# Altium PCB Lichtschlag.PcbDoc
Units mil, origin at the board's own origin, x right, y up, seen from the top; angles counter-clockwise.
Board outline 3937.01 x 3937.01 mil, 4 copper layers (Top Layer, Internal Plane 1, Internal Plane 2, Bottom Layer), stack 18.2 mil thick; 93 components, 87 nets, 376 pads, 59 vias.
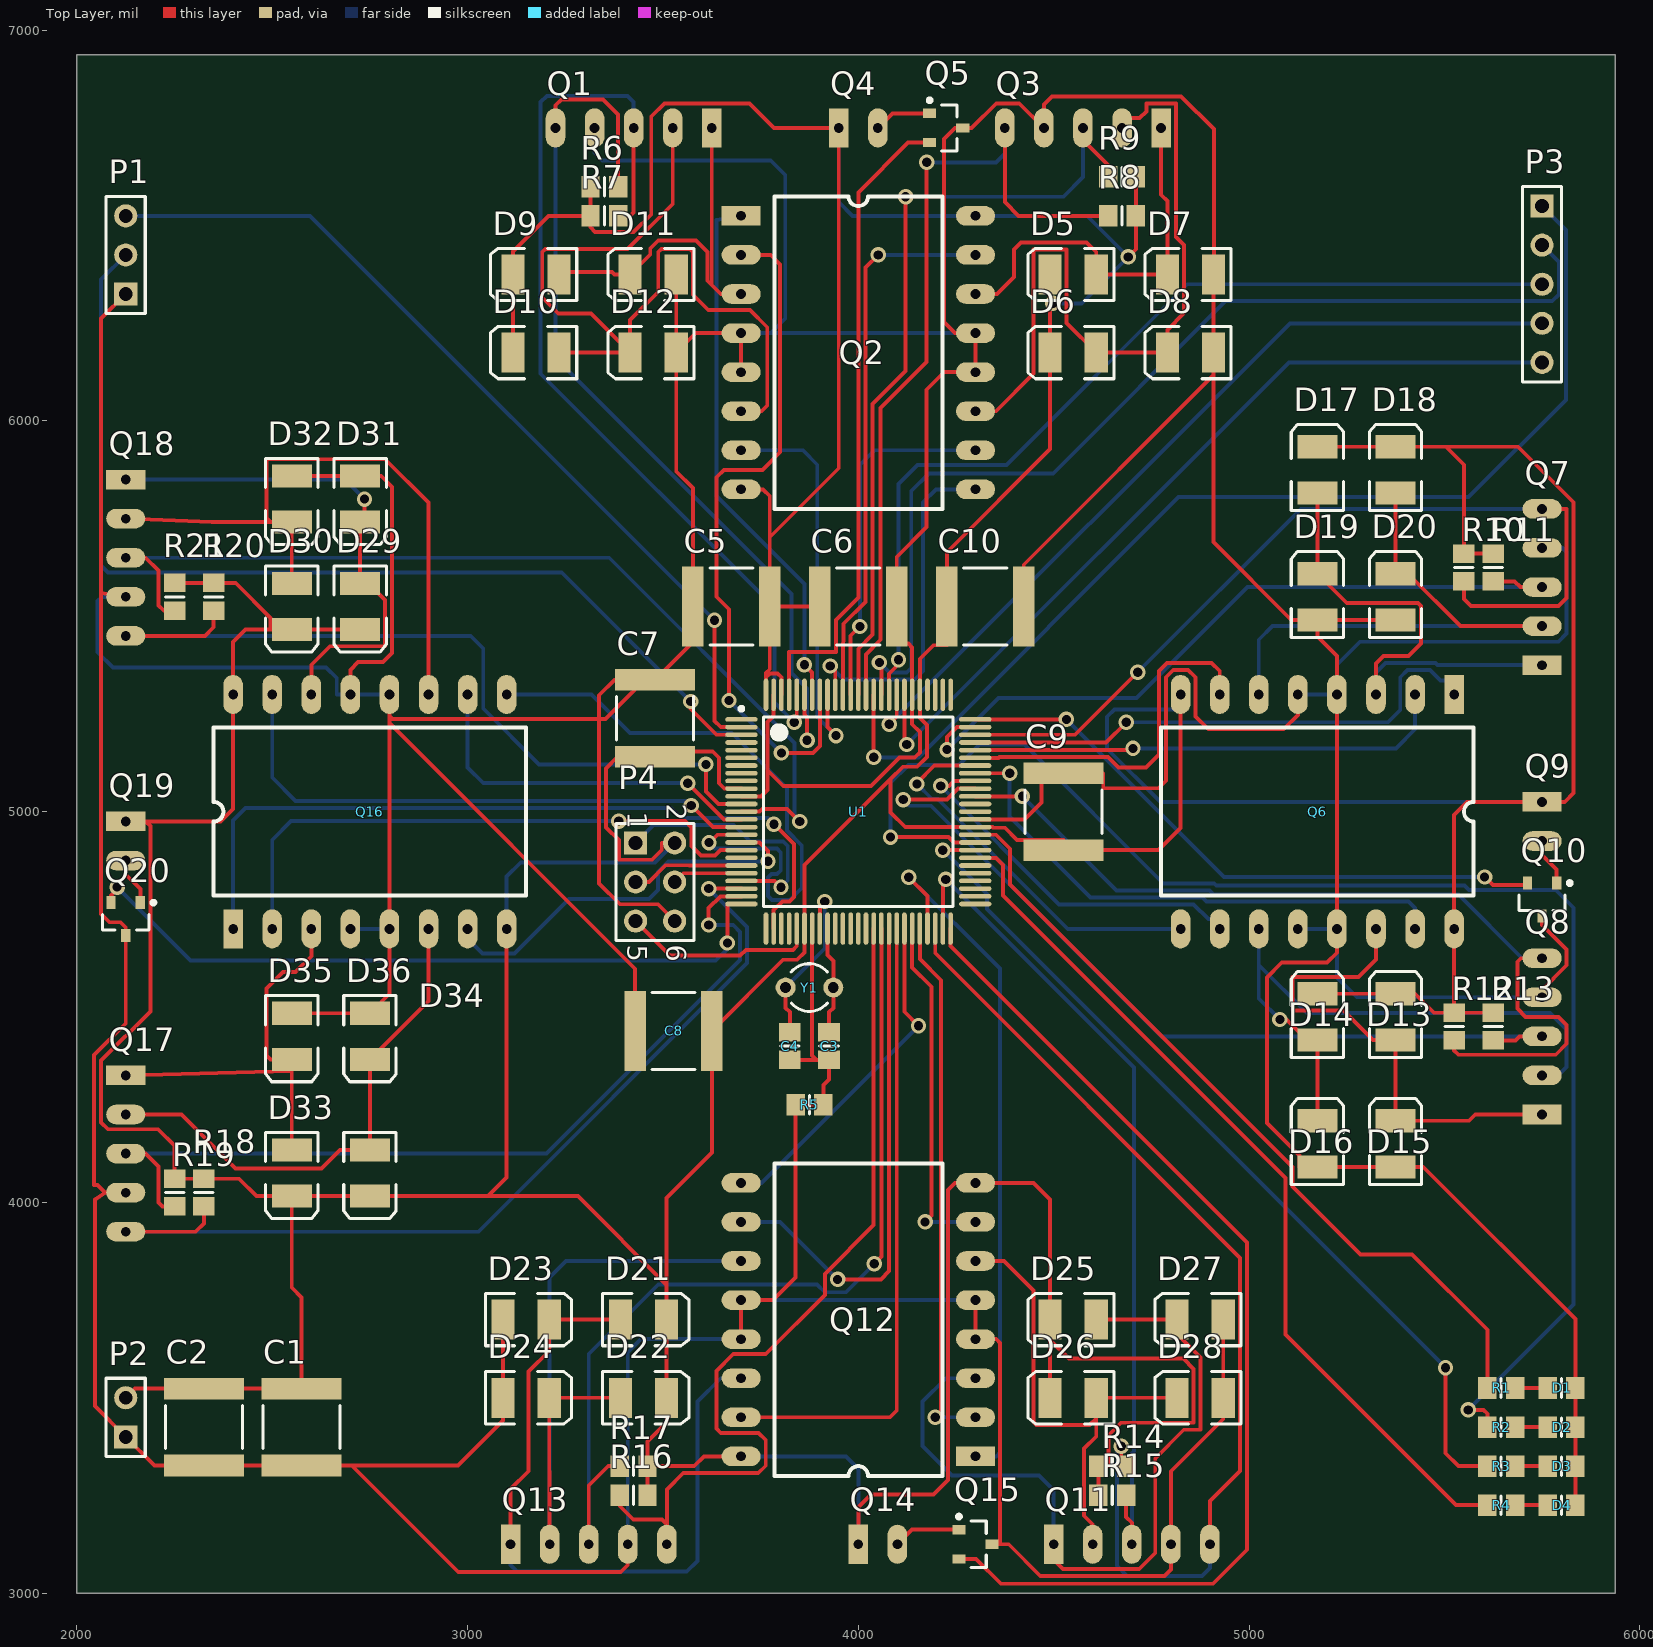
[diagram p0: Top Layer view]
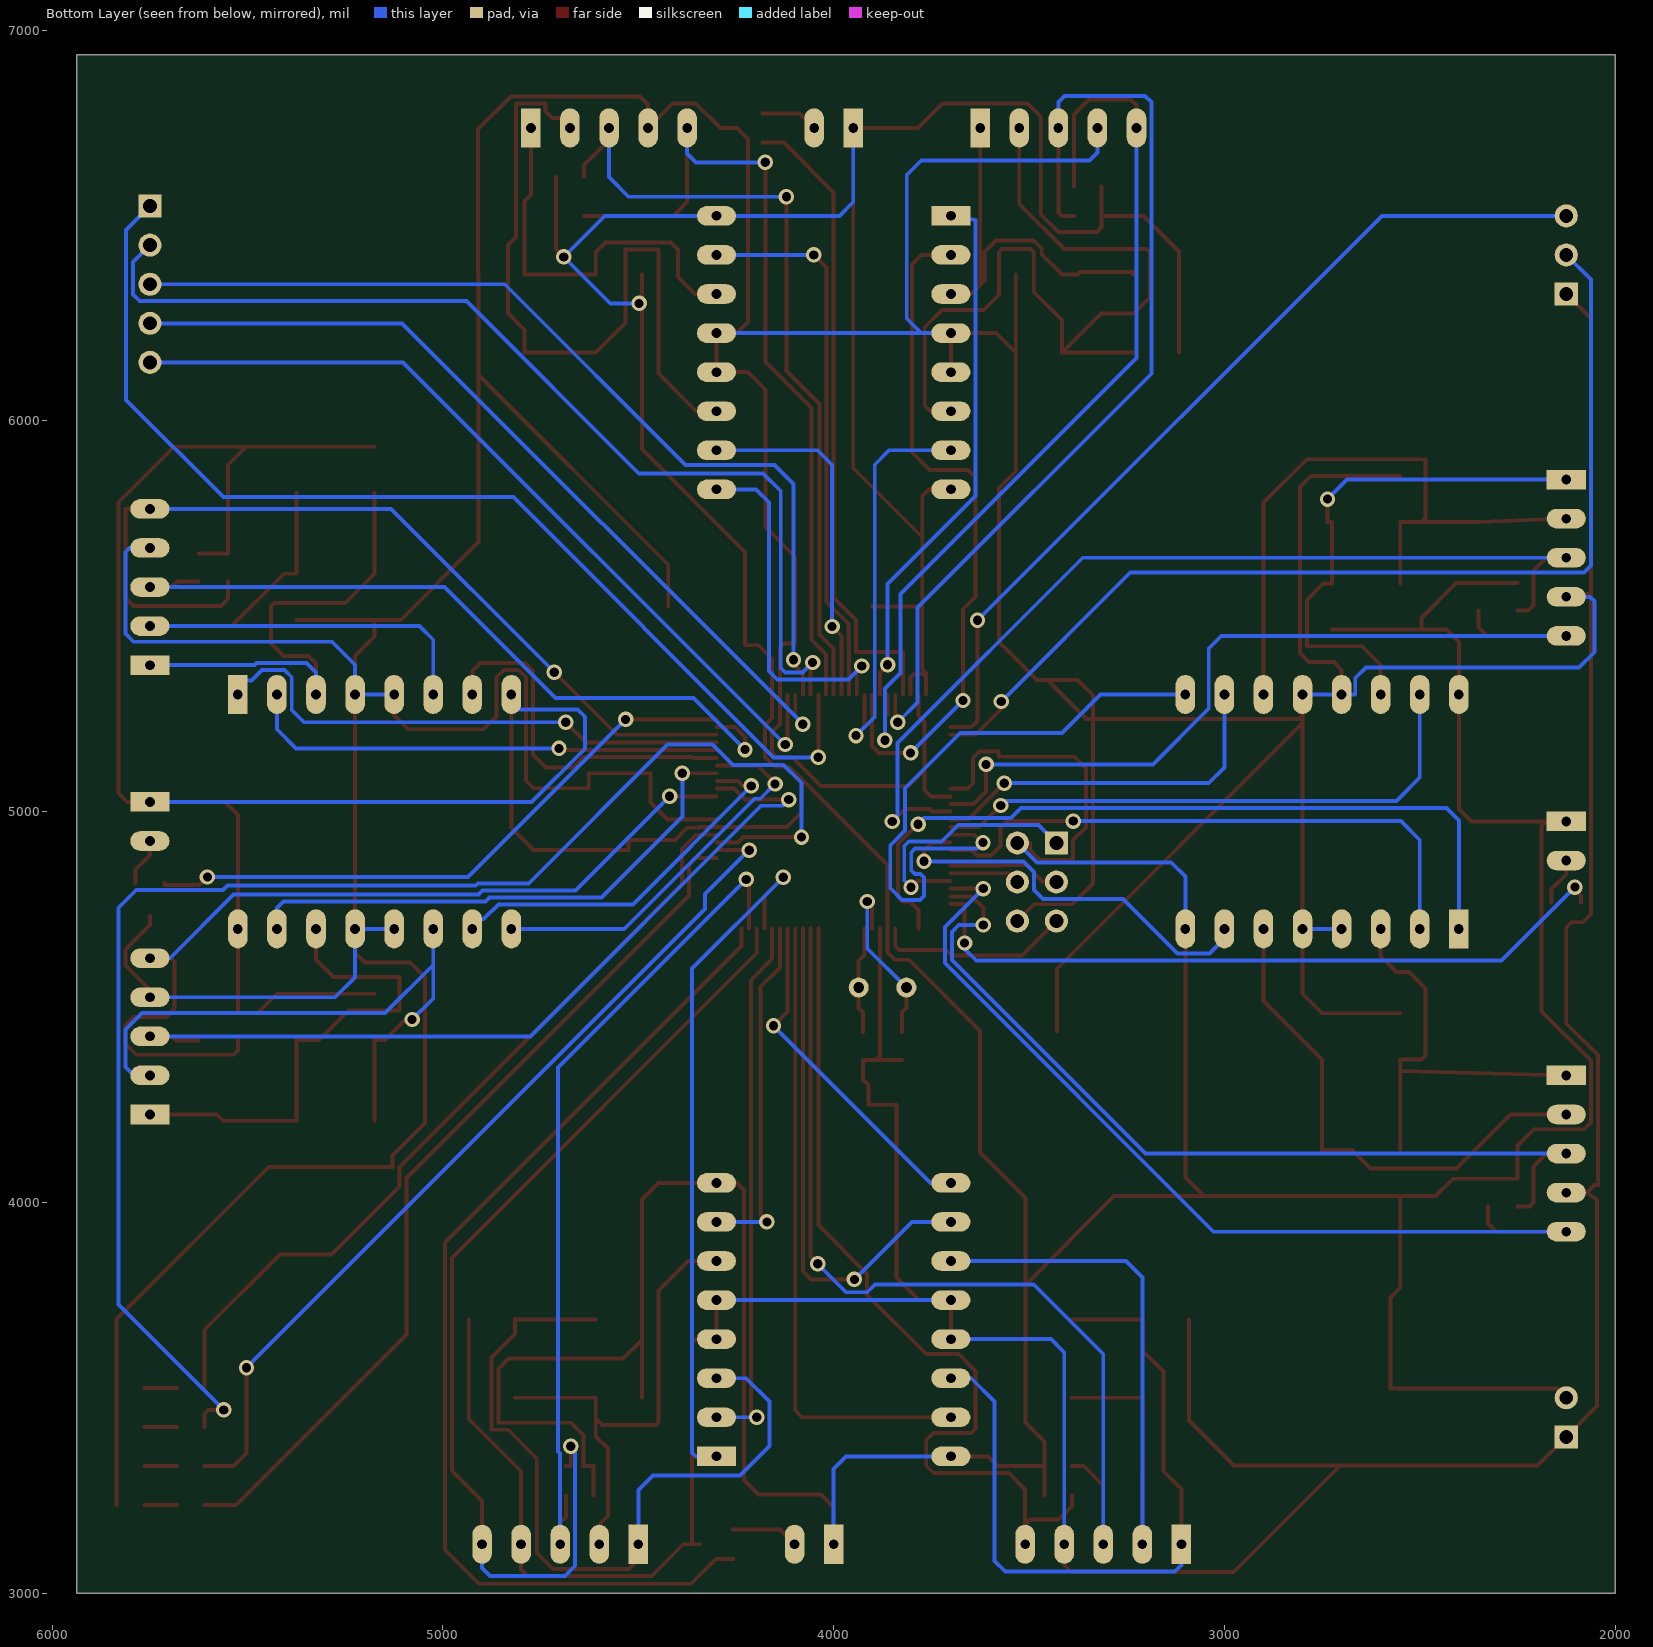
[diagram p1: Bottom Layer view, seen from below]
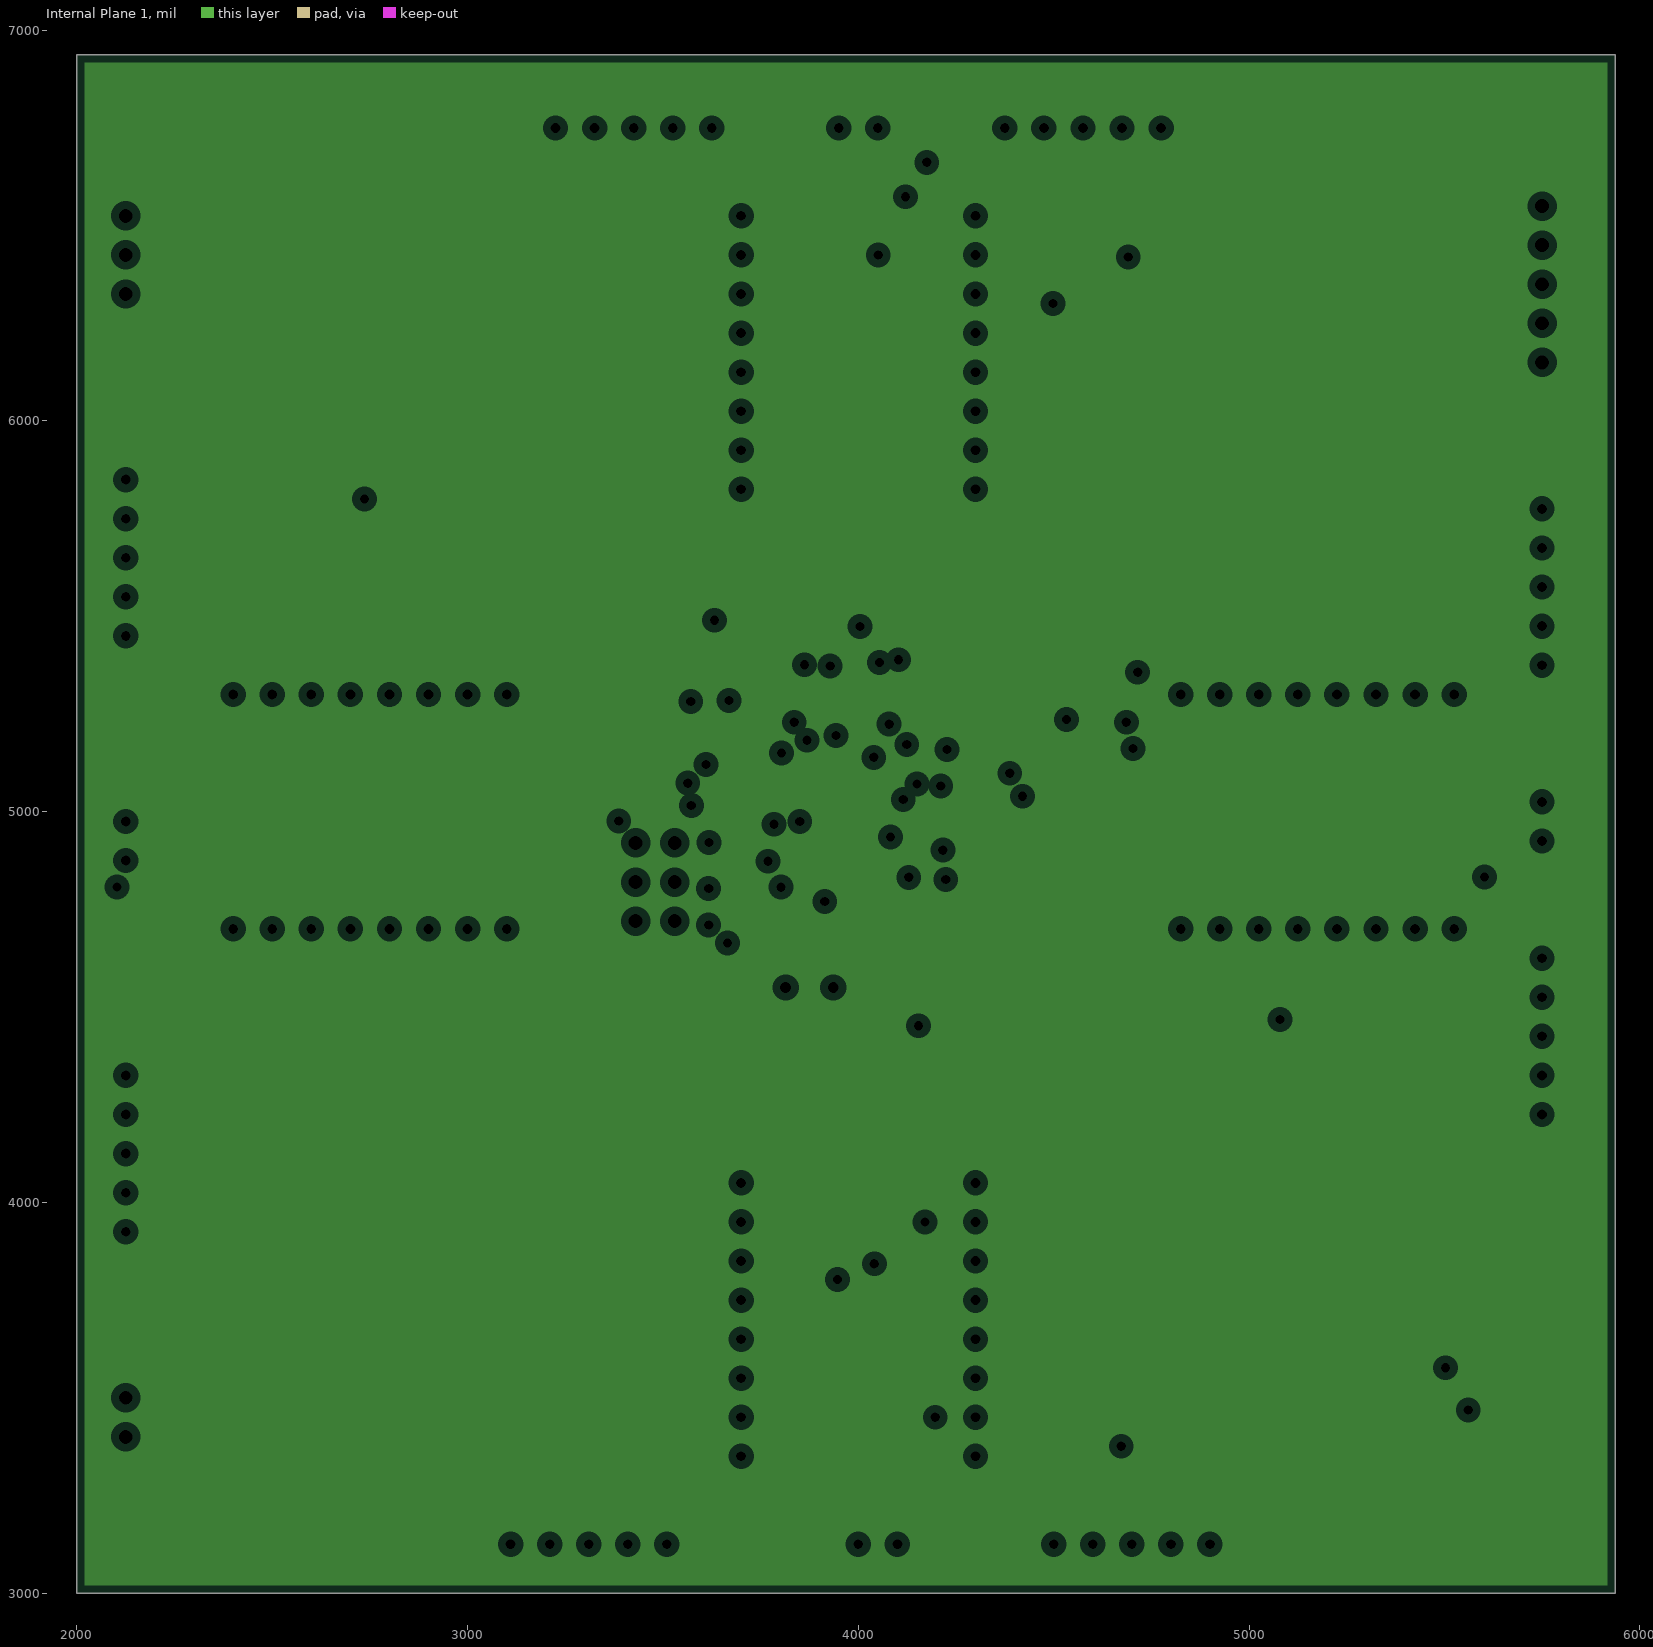
[diagram p2: Internal Plane 1, clearances drawn from the general rule]
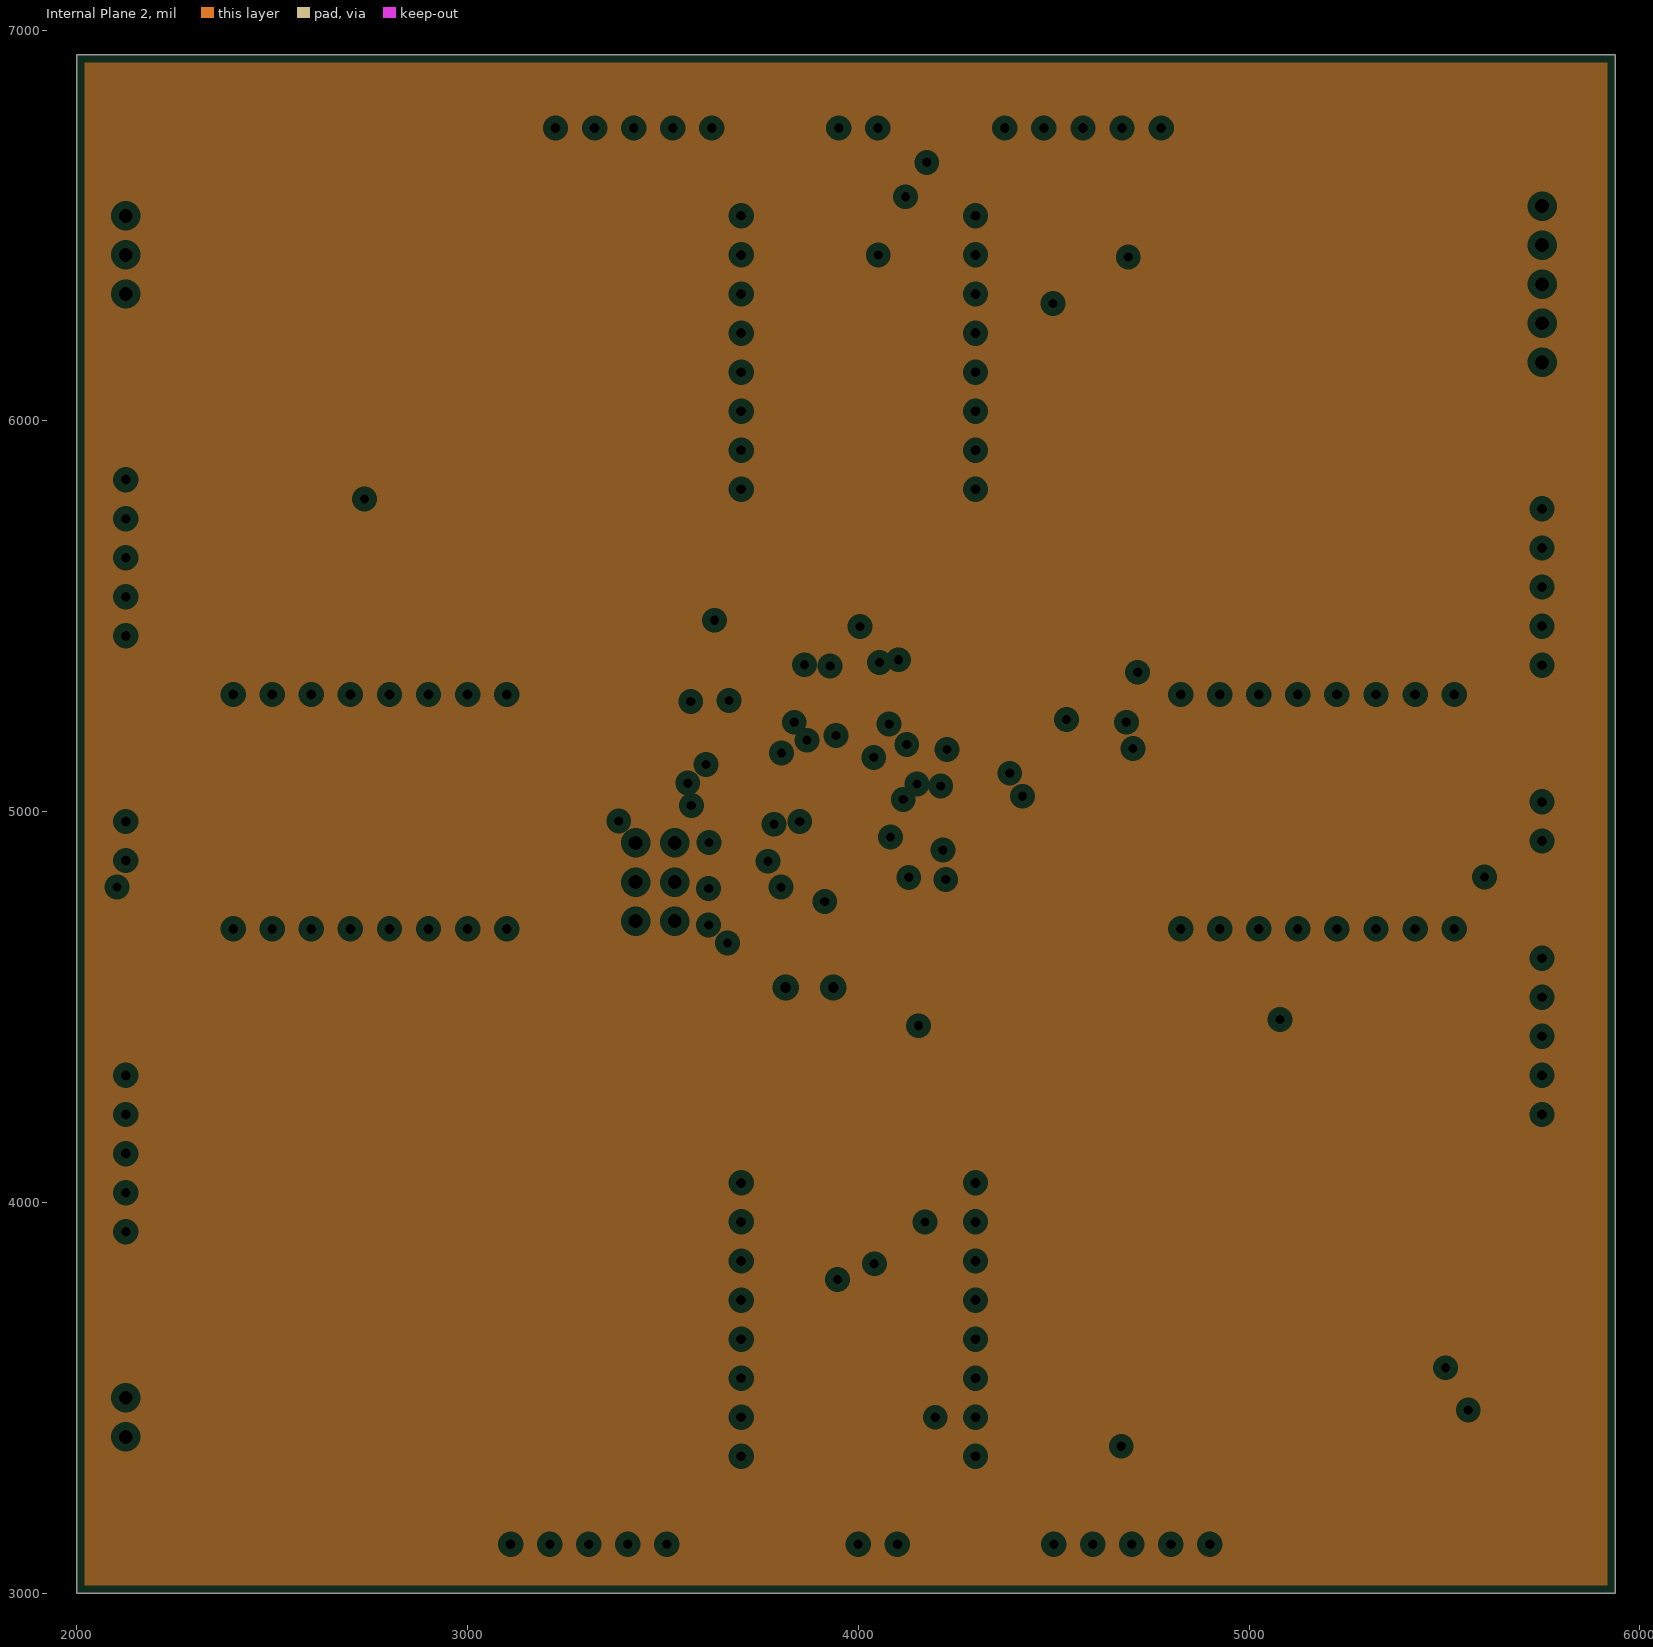
[diagram p3: Internal Plane 2, clearances drawn from the general rule]

## Layer stack, top to bottom
Top Solder: solder mask 0.4, Solder Resist, Dk 3.5
Top Layer: signal copper 1.4
Internal Plane 1: plane copper 1.4
Internal Plane 2: plane copper 1.4
Dielectric 1: dielectric 12.6, FR-4, Dk 4.8
Bottom Layer: signal copper 1.4
Bottom Solder: solder mask 0.4, Solder Resist, Dk 3.5

## Board outline
2000,3000 5937.01,3000 5937.01,6937.01 2000,6937.01

## Design rules (kind name [scope] priority, off if disabled: settings)
Clearance [All] p1: gap=7.87
PlaneClearance [All] p1: clearance=20
PlaneConnect [All] p1: planeconnectstyle=Relief reliefexpansion=20 reliefentries=4 reliefconductorwidth=10 reliefairgap=10
PolygonConnect [All] p1: connectstyle=Relief reliefconductorwidth=10 reliefentries=4 polygonreliefangle="90 Angle" airgapwidth=10
RoutingVias [All] p1: holewidth=23.62 width=39.37 viastyle="Through Hole" minholewidth=28 minwidth=50 maxholewidth=28 maxwidth=50
SolderMaskExpansion [All] p1: expansion=4
UnpouredPolygon [All] p1: allowunpoured=FALSE
Width [All] p1: maxlimit=50 minlimit=8 preferedwidth=10
27 further rules are at their usual default settings.

## Classes and differential pairs
component class CPU: C1 C2 C3 C4 C5 C6 C7 C8 C9 C10 D1 D2 D3 D4 P1 P2 P3 P4 R1 R2 R3 R4 R5 U1 Y1
component class Motor1: D5 D6 D7 D8 D9 D10 D11 D12 D13 D14 D15 D16 D17 D18 D19 D20 Q1 Q2 Q3 Q4 Q5 Q6 Q7 Q8 Q9 Q10 R6 R7 R8 R9 R10 R11 R12 R13
component class Motor2: D21 D22 D23 D24 D25 D26 D27 D28 D29 D30 D31 D32 D33 D34 D35 D36 Q11 Q12 Q13 Q14 Q15 Q16 Q17 Q18 Q19 Q20 R14 R15 R16 R17 R18 R19 R20 R21

## Components (designator, comment, footprint, x,y, rotation, side; value= is the part's Value field where it differs from the comment)
C1 "47uF" 2220 2575,3425 r270 top
C2 "100nF" 2220 2325,3425 r90 top
C3 "22pF" 6-0805_N 3925,4400 r90 top
C4 "22pF" 6-0805_N 3825,4400 r90 top
C5 "100nF" 2220 3675,5525 r0 top
C6 "100nF" 2220 4000,5525 r180 top
C7 "100nF" 2220 3480,5239 r270 top
C8 "100nF" 2220 3527,4439 r0 top
C9 "100nF" 2220 4525,5000 r270 top
C10 "100nF" 2220 4325,5525 r180 top
D1 "LED3-BL" 6-0805_N 5800,3525 r0 top
D2 "LED3-GN" 6-0805_N 5800,3425 r0 top
D3 "LED3-RT" 6-0805_N 5800,3325 r0 top
D4 "LED3-YE" 6-0805_N 5800,3225 r0 top
D5 "Diode" 3.5X2.8X1.9 4550,6375 r180 top
D6 "Diode" 3.5X2.8X1.9 4550,6175 r180 top
D7 "Diode" 3.5X2.8X1.9 4850,6375 r180 top
D8 "Diode" 3.5X2.8X1.9 4850,6175 r180 top
D9 "Diode" 3.5X2.8X1.9 3175,6375 r180 top
D10 "Diode" 3.5X2.8X1.9 3175,6175 r180 top
D11 "Diode" 3.5X2.8X1.9 3475,6375 r180 top
D12 "Diode" 3.5X2.8X1.9 3475,6175 r180 top
D13 "Diode" 3.5X2.8X1.9 5375,4475 r90 top
D14 "Diode" 3.5X2.8X1.9 5175,4475 r90 top
D15 "Diode" 3.5X2.8X1.9 5375,4150 r90 top
D16 "Diode" 3.5X2.8X1.9 5175,4150 r90 top
D17 "Diode" 3.5X2.8X1.9 5175,5875 r90 top
D18 "Diode" 3.5X2.8X1.9 5375,5875 r90 top
D19 "Diode" 3.5X2.8X1.9 5175,5550 r90 top
D20 "Diode" 3.5X2.8X1.9 5375,5550 r90 top
D21 "Diode" 3.5X2.8X1.9 3450,3700 r0 top
D22 "Diode" 3.5X2.8X1.9 3450,3500 r0 top
D23 "Diode" 3.5X2.8X1.9 3150,3700 r0 top
D24 "Diode" 3.5X2.8X1.9 3150,3500 r0 top
D25 "Diode" 3.5X2.8X1.9 4550,3700 r180 top
D26 "Diode" 3.5X2.8X1.9 4550,3500 r180 top
D27 "Diode" 3.5X2.8X1.9 4875,3700 r180 top
D28 "Diode" 3.5X2.8X1.9 4875,3500 r180 top
D29 "Diode" 3.5X2.8X1.9 2725,5525 r270 top
D30 "Diode" 3.5X2.8X1.9 2550,5525 r270 top
D31 "Diode" 3.5X2.8X1.9 2725,5800 r270 top
D32 "Diode" 3.5X2.8X1.9 2550,5800 r270 top
D33 "Diode" 3.5X2.8X1.9 2550,4075 r270 top
D34 "Diode" 3.5X2.8X1.9 2750,4075 r270 top
D35 "Diode" 3.5X2.8X1.9 2550,4425 r270 top
D36 "Diode" 3.5X2.8X1.9 2750,4425 r270 top
P1 "COM" HDR1X3 2125,6325 r90 top
P2 "Power" HDR1X2 2125,3400 r90 top
P3 "ADC" HDR1X5 5750,6550 r270 top
P4 "Header 3X2" HDR2X3 3430,4920 r270 top
Q1 "L_CON" "Lichschlag Connector" 3625,6750 r270 top
Q2 "L293D" L293D 3700,6525 r0 top
Q3 "L_CON" "Lichschlag Connector" 4775,6750 r270 top
Q4 "Lichtschlag LED" "Lichtschlag LED" 3950,6750 r90 top
Q5 "QNPN" SOT-23B_L 4225,6750 r0 top
Q6 "L293D" L293D 5525,5300 r270 top
Q7 "L_CON" "Lichschlag Connector" 5750,5375 r180 top
Q8 "L_CON" "Lichschlag Connector" 5750,4225 r180 top
Q9 "Lichtschlag LED" "Lichtschlag LED" 5750,5025 r0 top
Q10 "QNPN" SOT-23B_L 5750,4775 r270 top
Q11 "L_CON" "Lichschlag Connector" 4500,3125 r90 top
Q12 "L293D" L293D 4300,3350 r180 top
Q13 "L_CON" "Lichschlag Connector" 3110,3125 r90 top
Q14 "Lichtschlag LED" "Lichtschlag LED" 4000,3125 r90 top
Q15 "QNPN" SOT-23B_L 4300,3125 r0 top
Q16 "L293D" L293D 2400,4700 r90 top
Q17 "L_CON" "Lichschlag Connector" 2125,4325 r0 top
Q18 "L_CON" "Lichschlag Connector" 2125,5850 r0 top
Q19 "Lichtschlag LED" "Lichtschlag LED" 2125,4975 r0 top
Q20 "QNPN" SOT-23B_L 2125,4725 r270 top
R1 "1k" 6-0805_N 5645.47,3525 r0 top
R2 "1k" 6-0805_N 5645.47,3425 r0 top
R3 "1k" 6-0805_N 5645.47,3325 r0 top
R4 "1k" 6-0805_N 5645.47,3225 r0 top
R5 "1.1M" 6-0805_N 3875,4250 r0 top
R6 "100K" 6-0805_N 3350,6600 r180 top
R7 "100K" 6-0805_N 3350,6525 r180 top
R8 "100K" 6-0805_N 4675,6525 r0 top
R9 "100K" 6-0805_N 4675,6625 r0 top
R10 "100K" 6-0805_N 5550,5625 r90 top
R11 "100K" 6-0805_N 5625,5625 r90 top
R12 "100K" 6-0805_N 5525,4450 r90 top
R13 "100K" 6-0805_N 5625,4450 r90 top
R14 "100K" 6-0805_N 4650,3325 r180 top
R15 "100K" 6-0805_N 4650,3250 r180 top
R16 "100K" 6-0805_N 3425,3250 r0 top
R17 "100K" 6-0805_N 3425,3325 r0 top
R18 "100K" 6-0805_N 2325,4025 r90 top
R19 "100K" 6-0805_N 2250,4025 r90 top
R20 "100K" 6-0805_N 2350,5550 r90 top
R21 "100K" 6-0805_N 2250,5550 r90 top
U1 "ATmega2560-16AU" 100A_M 4000,5000 r0 top
Y1 "16Mhz" R38 3875,4550 r270 top

## Footprints (in the part's own frame and the unit in brackets; to place one, negate y for a bottom-side part, rotate by r counter-clockwise, add the part's x,y. Pads: shape width x height; smd on the part's side, far side on the other; paste and mask are expansions set on the pad)
3.5X2.8X1.9 [mm] "SM LED; 2 C-Bend Leads; Body 3.5 x 2.8 x 1.9 mm, inc leads (LxWxH typ)"
  rect 1.5x2.6 smd: 1(-1.5,0) 2(1.5,0)
  silkscreen extent -2.65,-1.7 2.95,1.7
6-0805_N [mm] "Chip Resistor, Body 2.0x1.2mm, IPC Medium Density"
  rect 1.2x1.4 smd: 1(-0.9,0) 2(0.9,0)
  silkscreen extent 0,-0.6 0,0.6, body extent -1.07,-0.7 1.07,0.7, height 0.7
100A_M [mm] "Thin QFP, 100-Leads, Body 14x14mm, Pitch 0.5mm, IPC Low Density"
  oval 2.1x0.3 smd: 1(-7.6,6) 2(-7.6,5.5) 3(-7.6,5) 4(-7.6,4.5) 5(-7.6,4) 6(-7.6,3.5) 7(-7.6,3) 8(-7.6,2.5) 9(-7.6,2) 10(-7.6,1.5) 11(-7.6,1) 12(-7.6,0.5) 13(-7.6,0) 14(-7.6,-0.5) 15(-7.6,-1) 16(-7.6,-1.5) 17(-7.6,-2) 18(-7.6,-2.5) 19(-7.6,-3) 20(-7.6,-3.5) 21(-7.6,-4) 22(-7.6,-4.5) 23(-7.6,-5) 24(-7.6,-5.5) 25(-7.6,-6) 51(7.6,-6) 52(7.6,-5.5) 53(7.6,-5) 54(7.6,-4.5) 55(7.6,-4) 56(7.6,-3.5) 57(7.6,-3) 58(7.6,-2.5) 59(7.6,-2) 60(7.6,-1.5) 61(7.6,-1) 62(7.6,-0.5) 63(7.6,0) 64(7.6,0.5) 65(7.6,1) 66(7.6,1.5) 67(7.6,2) 68(7.6,2.5) 69(7.6,3) 70(7.6,3.5) 71(7.6,4) 72(7.6,4.5) 73(7.6,5) 74(7.6,5.5) 75(7.6,6)
  oval 0.3x2.1 smd: 26(-6,-7.6) 27(-5.5,-7.6) 28(-5,-7.6) 29(-4.5,-7.6) 30(-4,-7.6) 31(-3.5,-7.6) 32(-3,-7.6) 33(-2.5,-7.6) 34(-2,-7.6) 35(-1.5,-7.6) 36(-1,-7.6) 37(-0.5,-7.6) 38(0,-7.6) 39(0.5,-7.6) 40(1,-7.6) 41(1.5,-7.6) 42(2,-7.6) 43(2.5,-7.6) 44(3,-7.6) 45(3.5,-7.6) 46(4,-7.6) 47(4.5,-7.6) 48(5,-7.6) 49(5.5,-7.6) 50(6,-7.6) 76(6,7.6) 77(5.5,7.6) 78(5,7.6) 79(4.5,7.6) 80(4,7.6) 81(3.5,7.6) 82(3,7.6) 83(2.5,7.6) 84(2,7.6) 85(1.5,7.6) 86(1,7.6) 87(0.5,7.6) 88(0,7.6) 89(-0.5,7.6) 90(-1,7.6) 91(-1.5,7.6) 92(-2,7.6) 93(-2.5,7.6) 94(-3,7.6) 95(-3.5,7.6) 96(-4,7.6) 97(-4.5,7.6) 98(-5,7.6) 99(-5.5,7.6) 100(-6,7.6)
  silkscreen extent -7.72,-6.15 6.15,6.82, body extent -7,-7 7,7, height 1.6
2220 [mm] "Chip Capacitor, Body 5.7x5.0mm, IPC High Density"
  rect 1.4x5.2 smd: 1(-2.5,0) 2(2.5,0)
  silkscreen extent -1.4,-2.5 1.4,2.5, body extent -2.95,-2.63 2.95,2.63, height 1.4
HDR1X2 [mm] "Connector; Header; 2 Position"
  rect 1.5x1.5 hole 0.9: 1(0,0)
  round 1.5 hole 0.9: 2(2.54,0)
  silkscreen extent -1.27,-1.27 3.81,1.27
HDR1X3 [mm] "Connector; Header; 3 Position"
  rect 1.5x1.5 hole 0.9: 1(0,0)
  round 1.5 hole 0.9: 2(2.54,0) 3(5.08,0)
  silkscreen extent -1.27,-1.27 6.35,1.27
HDR1X5 [mm] "Connector; Header; 5 Position"
  rect 1.5x1.5 hole 0.9: 1(0,0)
  round 1.5 hole 0.9: 2(2.54,0) 3(5.08,0) 4(7.62,0) 5(10.16,0)
  silkscreen extent -1.27,-1.27 11.43,1.27
HDR2X3 [mm] "Connector; Header; 3x2 Position"
  rect 1.5x1.5 hole 0.9: 1(0,0)
  round 1.5 hole 0.9: 2(0,2.54) 3(2.54,0) 4(2.54,2.54) 5(5.08,0) 6(5.08,2.54)
  silkscreen extent -1.27,-1.27 6.35,3.81
L293D [mil]
  rect 100x50 hole 25: 1(0,0)
  oval 100x50 hole 25: 2(0,-100) 3(0,-200) 4(0,-300) 5(0,-400) 6(0,-500) 7(0,-600) 8(0,-700) 9(600,-700) 10(600,-600) 11(600,-500) 12(600,-400) 13(600,-300) 14(600,-200) 15(600,-100) 16(600,0)
  silkscreen extent 85,-750 515,50
"Lichschlag Connector" [mil]
  rect 100x50 hole 25: 1(0,0)
  oval 100x50 hole 25: 2(0,-100) 3(0,-200) 4(0,-300) 5(0,-400)
"Lichtschlag LED" [mil]
  rect 100x50 hole 25: 1(0,0)
  oval 100x50 hole 25: 2(0,-100)
R38 [mm] "Crystal, Thru-Hole; 2 Leads; Body 3.1 x 8.2 mm (Dia.xH)"
  round 1.3 hole 0.7: 1(0,1.55) 2(0,-1.55)
  silkscreen extent -1.55,-1.19 1.55,1.17
SOT-23B_L [mm] "SOT23, 3-Leads, Body 2.9x1.3mm, Pitch 0.95mm, Lead Span 2.4mm, IPC High Density"
  rect 0.85x0.6 smd: 1(-1.075,0.95) 2(-1.075,-0.95) 3(1.075,0)
  silkscreen extent -1.2,-1.5 0.7,1.92, body extent -0.7,-1.5 0.7,1.5, height 1.14

## Part data
C1: library part "Cap Pol3", "Polarized Capacitor (Surface Mount)"
C2 C3 C4 C5 C6 C7 C8 C9 C10: library part "Cap Semi", "Capacitor (Semiconductor SIM Model)"
D1 D2 D3 D4: library part LED3, "Typical BLUE SiC LED"
D5 D6 D7 D8 D9 D10 D11 D12 D13 D14 D15 D16 D17 D18 D19 D20 D21 D22 D23 D24 D25 D26 D27 D28 D29 D30 D31 D32 D33 D34 D35 D36: "Default Diode"
P1: library part "Header 3", "Header, 3-Pin"
P2: library part "Header 2", "Header, 2-Pin"
P3: library part "Header 5", "Header, 5-Pin"
P4: "Header, 3-Pin, Dual row"
Q1 Q3 Q7 Q8 Q11 Q13 Q17 Q18: library part "Lichtschlag Connector", "Lichtschlag Connector"
Q2 Q6 Q12 Q16: "H-Bridge"
Q4 Q9 Q14 Q19: "NPN General Purpose Amplifier"
Q5 Q10 Q15 Q20: "NPN Bipolar Transistor"
R1 R2 R3 R4 R5 R6 R7 R8 R9 R10 R11 R12 R13 R14 R15 R16 R17 R18 R19 R20 R21: library part Res3, "Resistor"
U1: library part CMP-0095-00210-2, "8-bit AVR Microcontroller, 4.5-5.5V, 16MHz, 256KB Flash, 4KB EEPROM, 8KB SRAM, 86 GPIO pins, 100-pin TQFP, Industrial Grade (-40°C to 85°C), Pb-Free"
Y1: library part XTAL, "Crystal Oscillator"

## Via types
v1: diameter 39.37, hole 23.62, Top Layer to Bottom Layer, 59 vias

## Nets (pads, with @x,y where several pads share a name; then routed paths per layer and width w, separated by ;. In a path a pad name is that pad's centre, name@x,y a point inside that pad or via, vN(x,y) a via of type N, cw(c..) or ccw(c..) an arc to the next point about the centre after c; other vN are vias at no path point)
5V: C1.1 C2.2 C5.2 C6.2 C7.2 C8.2 C9.2 C10.2 D5.2 D6.2 D9.2 D10.2 D13.2 D14.2 D17.2 D18.2 D21.2 D22.2 D25.2 D26.2 D29.2 D30.2 D33.2 D34.2 P2.2 P4.2 Q2.8 Q2.16 Q4.1 Q6.8 Q6.16 Q9.1 Q12.8 Q12.16 Q14.1 Q16.8 Q16.16 Q19.1 R6.2 R7.2 R8.2 R9.2 R10.2 R11.2 R12.2 R13.2 R14.2 R15.2 R16.2 R17.2 R18.2 R19.2 R20.2 R21.2 U1.10 U1.31 U1.61 U1.80 U1.98 U1.100 | length 25021.1
  Top Layer w10: P2.2 2148.43,3523.43 C2.2 C1.1 2575,3757 2550,3782 D33.2 ; Q19.1 2176,4975 ; R21.2 R20.2 2406.57,5585.43 2496,5496 2496,5465.94 ; D29.2 D30.2 2496,5465.94 ; Q16.8 3100,4064 3051.94,4015.94 ; D10.2 D9.2 3115.94,6433.94 3207,6525 R7.2 ; R6.2 R7.2 ; R16.2 R17.2 ; P4.2 3497,4920 3497,4902 3472,4877 3387,4877 3387,4927.44 3354.44,4960 3354.44,5111.01 3384,5140.57 C7.2 3577.44,5140.57 3577.44,5153.56 3627.41,5153.56 3642.95,5138.02 3642.95,5072.92 3656.81,5059.06 U1.10 ; Q12.16 3605,3350 3580,3325 R17.2 ; Q2.8 3756.43,5825 3773.43,5808 3773.43,5702.43 ; U1.100 3763.78,5344 ; U1.98 3803.15,5344 3793.15,5354 3773.78,5354 3763.78,5344 ; C6.2 C5.2 ; Q14.1 4000,3220 4032,3252 4192,3252 4230,3290 4230,4032 4248,4050 Q12.8 4448,4050 4490.94,4007.06 D25.2 4490.94,3648 ; D26.2 4490.94,3648 ; D5.2 v1@4490.94,6308.06 ; v1(4498,6301) v1@4490.94,6308.06 ; R15.2 R14.2 4640,3325 4640,3403.94 4672,3435.94 4858.35,3435.94 4858.35,3573.65 4832,3600 4538.94,3600 4490.94,3648 ; v1(4691,6420) 4710.43,6439.43 R8.2 R9.2 ; Q6.8 4825,4958.57 4768,4901.57 C9.2 4525,4928 4406,4928 4375.18,4958.82 4344.81,4958.82 4343,4960.63 U1.61 4120.25,4960.63 4082.44,4998.44 4082.44,5083.44 ; D14.2 D13.2 5425,4534.06 5473.62,4485.43 R12.2 ; D17.2 D18.2 5504,5934.06 ; R13.2 R12.2 ; R11.2 R10.2 5550,5888.06 5504,5934.06 ; 2176,4975 2368,4975 2400,5007 Q16.16 2400,5433.94 2432,5465.94 2496,5465.94 ; 2176,4975 2188,4963 2188,4488.75 2062.13,4362.87 2062.13,4205 2080,4187.13 2208,4187.13 2250,4145.13 R19.2 R18.2 2415,4060.43 2459.49,4015.94 D33.2 ; D33.2 D34.2 3051.94,4015.94 ; 3051.94,4015.94 3282.06,4015.94 3509.06,3788.94 ; R7.2 3314.57,6496 3326.57,6484 3425,6484 3470,6529 3470,6779 3504,6813 3721,6813 3784,6750 Q4.1 3950,5879 3773.43,5702.43 ; R17.2 3460.43,3388 3509.06,3436.62 D22.2 D21.2 3509.06,3788.94 ; 3509.06,3788.94 3509.06,4011 3625.43,4127.37 C8.2 3807.43,4621 3843.2,4621 3862.2,4640 U1.31 3862.2,4863.2 4082.44,5083.44 ; 3763.78,5344 3763.78,5355 3773.43,5364.65 C5.2 ; C5.2 3773.43,5702.43 ; 4082.44,5083.44 4114.1,5115.1 4150.58,5115.1 4175.35,5139.88 4175.35,5222.06 4157.48,5239.94 U1.80 4157.48,5391.48 4192,5426 4226.57,5426 C10.2 4226.57,5664 4490.94,5928.37 D6.2 v1@4490.94,6308.06 ; 5504,5934.06 5688.94,5934.06 5831,5792 5831,5048 5808,5025 Q9.1 5558,5025 5525,4992 Q6.16 R12.2
  Bottom Layer w10: Q16.8 3100,4834 3136,4870 3480,4870 P4.2 ; Q12.16 3968,3350 4000,3318 Q14.1 ; Q4.1 3950,6560 3985,6525 Q2.16 4586,6525 v1(4691,6420) 4572,6301 v1(4498,6301) ; Q6.8 4825,5262 4656,5262 4637,5243 4637,5161 4773,5025 Q9.1
GND: C1.2 C2.1 C3.1 C4.1 C5.1 C6.1 C7.1 C8.1 C9.1 C10.1 D1.2 D2.2 D3.2 D4.2 D7.1 D8.1 D11.1 D12.1 D15.1 D16.1 D19.1 D20.1 D23.1 D24.1 D27.1 D28.1 D31.1 D32.1 D35.1 D36.1 P1.1 P2.1 P4.6 Q1.4 Q2.4 Q2.5 Q2.12 Q2.13 Q3.4 Q5.3 Q6.4 Q6.5 Q6.12 Q6.13 Q7.4 Q8.4 Q10.3 Q11.4 Q12.4 Q12.5 Q12.12 Q12.13 Q13.4 Q15.3 Q16.4 Q16.5 Q16.12 Q16.13 Q17.4 Q18.4 Q20.3 R5.1 R5.2 U1.11 U1.32 U1.62 U1.81 U1.99 | length 30936.1
  Top Layer w10: Q17.4 2072,4025 ; Q18.4 2062,5560 ; P1.1 2062,6262 2062,5560 ; D35.1 D36.1 2800,4534.06 Q16.5 2800,5226.57 ; D32.1 D31.1 2778.94,5859.06 2806.93,5831.07 2806.93,5405.93 2784,5383 2720,5383 2700,5363 Q16.13 ; Q16.12 2800,5245 ; D23.1 D24.1 3090.94,3442 2975.52,3326.57 2703.43,3326.57 ; Q13.4 3410,3072 3392,3054 2976,3054 2703.43,3326.57 ; C8.1 3428.57,4598 2800,5226.57 ; P4.6 3487,4763 3390,4763 3336.57,4816.43 3336.57,5237 ; D11.1 D12.1 ; Q12.13 Q12.12 3781.57,3750 3839.57,3808 R5.1 R5.2 3910.43,4300 3925,4314.57 C3.1 3893.32,4364.57 ; Q2.5 Q2.4 3584.06,6225 D12.1 ; U1.11 3751.37,5039.37 3768,5056 3768,5106 ; U1.99 3783.46,5245 3768,5229.54 3768,5106 ; C4.1 3893.32,4364.57 ; U1.32 3881.89,4376 3893.32,4364.57 ; U1.62 4425.32,4980.32 4469,5024 4469,5098.43 C9.1 4627,5098.43 4627,5060 4768,5060 4787.13,5079.13 4787.13,5344 4806,5362.87 4844.13,5362.87 4863,5344 4863,5244 4896,5211 5088,5211 5125,5248 Q6.5 ; Q12.5 Q12.4 4353,3650 4363,3640 4363,3125 ; Q15.3 4363,3125 ; C10.1 4423.43,5632 4909.06,6117.63 ; D27.1 D28.1 4934.06,3446.06 4800,3312 Q11.4 4800,3060.25 4784,3044.25 4465.75,3044.25 4385,3125 4363,3125 ; D20.1 D19.1 ; Q8.4 5750,4544 5813,4607 5813,4647 5750,4710 Q10.3 ; D4.2 D3.2 D2.2 D1.2 5835.43,3701.57 5446.06,4090.94 D15.1 D16.1 5128.82,4090.94 5128.82,4120.31 5045.83,4203.3 5045.83,4576 5083.83,4614 5200,4614 5225,4639 Q6.13 Q6.4 5225,5398 5175,5448 D19.1 ; 2062,5560 2062,4738 2083,4717 2112,4717 2125,4704 Q20.3 2125,4458 2044.25,4377.25 2044.25,4044.75 2052.25,4044.75 2072,4025 ; 2072,4025 2046,4007 2046,3479 P2.1 2198.43,3326.57 C2.1 C1.2 2703.43,3326.57 ; 2800,5226.57 2800,5245 ; 2800,5245 2808,5237 3336.57,5237 ; 3336.57,5237 3336.57,5297.99 3376,5337.43 C7.1@3453,5337.43 ; 3336.57,5237 3352.57,5237 C7.1@3453,5337.43 ; C7.1@3453,5337.43 C7.1 3576.57,5434 C5.1 3576.57,5828 3534.06,5870.52 D12.1 ; 3768,5106 3808,5066 4032,5066 4105.07,5139.07 4144.55,5139.07 4157.48,5152 4157.48,5204.19 4137.8,5223.87 U1.81 4137.8,5420.2 4128,5430 4098.43,5430 C6.1 4098.43,5652 4175,5728.57 4175,6080 4220,6125 Q2.12 Q2.13 4248,6225 4219.25,6253.75 4219.25,6721.25 4248,6750 Q5.3 4290,6750 4353,6813 4412,6813 Q3.4 4475,6809.75 4496,6830.75 4826.25,6830.75 4910,6747 4910,6375 D7.1 D8.1 4909.06,6117.63 ; 4909.06,6117.63 4909.06,5689.94 5108.06,5490.94 D19.1
  Bottom Layer w10: Q18.4 2064,5550 2053,5539 2053,5408 2092,5369 2638,5369 2665,5342 2665,5300 Q16.13 Q16.12 ; Q16.4 Q16.5 ; Q1.4 3325,6687 3345,6667 3776,6667 3813,6630 3813,6262 3776,6225 ; Q13.4 3410,3616 3444,3650 Q12.13 ; Q12.12 Q12.5 ; Q2.4 3776,6225 ; Q2.13 3776,6225 ; Q6.12 Q6.13 5225,4576 5276,4525 Q8.4 ; Q6.5 Q6.4 5225,5376 5284,5435 5792,5435 5813,5456 5813,5664 5802,5675 Q7.4
L1_E_A: D5.1 D7.2 Q2.14 Q3.1 | length 1036.1
  Top Layer w10: Q2.14 4355,6325 4398,6368 4398,6438.93 4416,6456.93 4584.13,6456.93 4609.06,6432 D5.1 D7.2 4790.94,6563 4775,6578.94 Q3.1
L1_E_B: D6.1 D8.2 Q2.11 Q3.2 | length 1923.3
  Top Layer w10: Q2.11 4352,6025 4448.54,6121.54 4448.54,6439.06 4533.35,6439.06 4533.35,6250.71 D6.1 D8.2 4790.94,6233 4834,6276.06 4834,6450 4812.87,6471.13 4812.87,6812.87 4737.13,6812.87 4737.13,6792.13 4720,6775 4675,6775 Q3.2
L1_R_A: D9.1 D11.2 Q1.1 Q2.3 | length 1020.4
  Top Layer w10: D9.1 3234.06,6381.16 3369.69,6381.16 3375.85,6375 D11.2 3467.41,6426.47 3467.41,6441.05 3488,6461.64 3584.36,6461.64 3614,6432 3614,6359 3625,6348 ; Q1.1 3625,6348 ; Q2.3 3648,6325 3625,6348
L1_R_B: D10.1 D12.2 Q1.2 Q2.6 | length 2149.8
  Top Layer w10: D10.1 D12.2 D12.2@3415.94,6175.11 ; Q1.2 3525,6555.73 3409.27,6440 3199,6440 3191,6432 3191,6316 3232,6275 3316.06,6275 D12.2@3415.94,6175.11 ; Q2.6 3752,6025 3767,6040 3767,6240 3723,6284 3616,6284 3577,6323 3577,6432 3569,6440 3496,6440 3488,6432 3488,6330.06 3415.94,6258 D12.2@3415.94,6175.11
L2_E_A: D13.1 D15.2 Q6.14 Q8.1 | length 1279.9
  Top Layer w10: Q6.14 5325,4621.46 5280,4576.46 5110.94,4576.46 5110.94,4491.65 5242,4491.65 5317.71,4415.94 D13.1 D15.2 5563,4209.06 5578.94,4225 Q8.1
L2_E_B: D14.1 D16.2 Q6.11 Q8.2 | length 1602.6
  Top Layer w10: v1(5079,4468) 5095.94,4468 5148,4415.94 D14.1 D16.2
  Bottom Layer w10: Q6.11 5025,4608 ; v1(5079,4468) 5025,4522 5025,4608 ; Q8.2 5791,4325 5812.87,4346.87 5812.87,4442.13 5770,4485 5148,4485 5025,4608
L2_R_A: D17.1 D19.2 Q6.3 Q7.1 | length 1311
  Top Layer w10: D17.1 D19.2 5250.06,5534 5432,5534 5440,5526 5440,5430 5408,5398 5344,5398 5325,5379 Q6.3
  Bottom Layer w10: Q6.3 5325,5356 5349.75,5380.75 5477,5380.75 5482.75,5375 Q7.1
L2_R_B: D18.1 D20.2 Q6.6 Q7.2 | length 1516.9
  Top Layer w10: D18.1 D20.2 5406.73,5609.06 5540.78,5475 Q7.2
  Bottom Layer w10: Q6.6 5025,5440 5060,5475 Q7.2
L3_E_A: D21.1 D23.2 Q12.14 Q13.1 | length 1892
  Top Layer w10: Q13.1 3110,3266 3156,3312 3156,3567 3209.06,3620.06 D23.2 D21.1
  Bottom Layer w10: Q13.1 3110,3072 3127,3055 3561,3055 3588,3082 3588,3490 3648,3550 Q12.14
L3_E_B: D22.1 D24.2 Q12.11 Q13.2 | length 1747.7
  Top Layer w10: Q13.2 3210,3312 3209.06,3312.94 D24.2 D22.1
  Bottom Layer w10: Q13.2 3210,3808 3252,3850 Q12.11
L3_R_A: D25.1 D27.2 Q11.1 Q12.3 | length 2023.8
  Top Layer w10: Q11.1 4500,3086 4523.87,3062.13 4719.13,3062.13 4760,3103 4760,3345 4833.07,3418.07 4876.22,3418.07 4876.22,3602.78 4815.94,3663.05 D27.2 D25.1
  Bottom Layer w10: Q12.3 4224,3550 4164,3490 4164,3377 4240,3301 4463,3301 4500,3264 Q11.1
L3_R_B: D26.1 D28.2 Q11.2 Q12.6 | length 1291.4
  Top Layer w10: Q12.6 4373,3850 4448,3775 4448,3438 4456,3430 4592,3430 4609.06,3447.06 ; Q11.2 4600,3176 4578,3198 4578,3369.94 4609.06,3401 4609.06,3447.06 ; D28.2 D26.1 4609.06,3447.06
L4_E_A: D29.1 D31.2 Q16.14 Q18.1 | length 1343.3
  Top Layer w10: Q16.14 2600,5376 2647.54,5423.54 2789.06,5423.54 2789.06,5542 2747,5584.06 D29.1 D31.2 2736,5740.94 v1(2736,5800)
  Bottom Layer w10: Q18.1 2686,5850 v1(2736,5800)
L4_E_B: D30.1 D32.2 Q16.11 Q18.2 | length 1699.7
  Top Layer w10: Q18.2 2346.06,5740.94 2496,5740.94 ; D30.1 D32.2 2496,5740.94 ; Q16.11 2900,5791 2789,5902 2485,5902 2485,5751.94 2496,5740.94
L4_R_A: D33.1 D35.2 Q16.3 Q17.1 | length 1116.6
  Top Layer w10: Q17.1 2550,4336 ; D33.1 2550,4336 ; Q16.3 2600,4630 2560,4590 2528,4590 2485,4547 2485,4376 2495.06,4365.94 D35.2 2550,4336
L4_R_B: D34.1 D36.2 Q16.6 Q17.2 | length 1329.7
  Top Layer w10: Q17.2 2268,4225 2406,4087 2625.94,4087 2673,4134.06 D34.1 D36.2 2900,4515.94 Q16.6
LED1: R1.1 U1.60 | length 2067.3
  Top Layer w10: U1.60 4352.2,4940.94 4387.95,4905.2 4387.95,4813.99 5110.94,4091 5110.94,4041 5284.94,3867 5417,3867 5610.04,3673.96 R1.1
LED2: R2.1 U1.59 | length 3807.5
  Top Layer w10: v1(4082.44,4935) 4231.26,4935 4245,4921.26 U1.59 ; v1(5561,3469) 5600,3469 5610.04,3458.96 R2.1
  Bottom Layer w10: v1(4082.44,4935) 4082.44,5074 4128,5119.56 4257.56,5119.56 4310,5172 4425,5172 4780.5,4816.5 4911,4816.5 4916.5,4811 5552,4811 5563,4800 5785,4800 5830.75,4754.25 5830.75,3738.75 v1(5561,3469)
LED3: R3.1 U1.58 | length 2280.1
  Top Layer w10: v1(4216.34,4901.57) U1.58 ; v1(5503,3576.93) 5503,3358 5536,3325 R3.1
  Bottom Layer w10: v1(4216.34,4901.57) 4329.03,4788.88 4329.03,4750.9 v1(5503,3576.93)
LED4: R4.1 U1.57 | length 2277.7
  Top Layer w10: U1.57 4352,4881.89 4370.08,4863.81 4370.08,4785.92 5093.07,4062.93 5093.07,3661.93 5530,3225 R4.1
MISO: P4.1 U1.22 | length 650.7
  Top Layer w10: U1.22 3786,4822.83 v1(3802,4806.83)
  Bottom Layer w10: P4.1 3475.57,4965.57 3681.25,4965.57 3723.38,4923.43 3808,4923.43 3819.43,4912 3819.43,4824.27 v1(3802,4806.83)
MOSI: P4.4 U1.21 | length 180.1
  Top Layer w10: P4.4 3552.52,4842.52 U1.21
NetD1_1: D1.1 R1.2 | length 83.7
  Top Layer w10: R1.2 D1.1
NetD2_1: D2.1 R2.2 | length 83.7
  Top Layer w10: R2.2 D2.1
NetD3_1: D3.1 R3.2 | length 83.7
  Top Layer w10: R3.2 D3.1
NetD4_1: D4.1 R4.2 | length 83.7
  Top Layer w10: R4.2 D4.1
NetP1_2: P1.2 U1.3 | length 2650.2
  Top Layer w10: v1(3571,5282) 3571,5263.41 3637.56,5196.85 U1.3
  Bottom Layer w10: P1.2 2062,6362 2062,5630 2080,5612 3241,5612 v1(3571,5282)
NetP1_3: P1.3 U1.2 | length 2268.6
  Top Layer w10: v1(3632,5490) 3632,5232.54 3648,5216.54 U1.2
  Bottom Layer w10: P1.3 2597,6525 v1(3632,5490)
NetP3_1: P3.1 U1.86 | length 2832
  Top Layer w10: v1(4039.37,5139.07) U1.86
  Bottom Layer w10: v1(4039.37,5139.07) 4154,5139.07 4819.93,5805 5562,5805 5811,6054 5811,6489 P3.1
NetP3_2: P3.2 U1.85 | length 2644.2
  Top Layer w10: v1(4054,5382) 4059.06,5376.94 U1.85
  Bottom Layer w10: v1(4054,5382) 4079.56,5356.44 4124,5356.44 4135.56,5368 4135.56,5820.56 4181,5866 4499,5866 4940,6307 5776,6307 5793,6324 5793,6407 P3.2
NetP3_3: P3.3 U1.84 | length 2408.4
  Top Layer w10: U1.84 4078.74,5353 4103,5377.26 v1(4103,5389)
  Bottom Layer w10: v1(4103,5389) 4103,5838.78 4151.22,5887 4379,5887 4842,6350 P3.3
NetP3_4: P3.4 U1.83 | length 2179.2
  Top Layer w10: v1(4079,5224) 4098.43,5243.43 U1.83
  Bottom Layer w10: v1(4079,5224) 5105,6250 P3.4
NetP3_5: P3.5 U1.82 | length 2160.8
  Top Layer w10: U1.82 4118.11,5177.89 v1(4124,5172)
  Bottom Layer w10: v1(4124,5172) 5102,6150 P3.5
NetQ1_3: Q1.3 R7.1 U1.96 | length 2505.2
  Top Layer w10: R7.1 3416,6525 3425,6534 Q1.3 ; v1(3836,5229.04) 3842.52,5235.56 U1.96
  Bottom Layer w10: Q1.3 3425,6816 3409,6832 3203,6832 3187,6816 3187,6121 3785.28,5522.72 3785.28,5279.76 v1(3836,5229.04)
NetQ1_5: Q1.5 R6.1 U1.95 | length 2377.6
  Top Layer w10: Q1.5 3225,6808 3240,6823 3346.43,6823 3385.43,6784 R6.1 ; U1.95 3862.2,5248.41 3869,5241.61 v1(3869,5183)
  Bottom Layer w10: Q1.5 3225,6161.17 3829.44,5556.73 3829.44,5354.95 3869,5315.39 v1(3869,5183)
NetQ2_1: Q2.1 U1.94 | length 1380.2
  Top Layer w10: v1(3862,5376) 3881.89,5356.11 U1.94
  Bottom Layer w10: Q2.1 3637,6514 3637,5808 3862,5583 v1(3862,5376)
NetQ2_2: Q2.2 U1.93 | length 1791.7
  Top Layer w10: v1(3669,5284.59) 3669,5518.12 3637,5550.12 3637,5856 3656,5875 3755,5875 3800,5920 3800,6401 3776,6425 Q2.2 ; v1(3803.15,5150.44) 3884.01,5150.44 3901.57,5168 U1.93
  Bottom Layer w10: v1(3669,5284.59) v1(3803.15,5150.44)
NetQ2_7: Q2.7 U1.92 | length 1036.9
  Top Layer w10: U1.92 3921.26,5216.52 v1(3943,5194.78)
  Bottom Layer w10: Q2.7 3858,5925 3895,5888 3895,5242.78 v1(3943,5194.78)
NetQ2_9: Q2.9 U1.91 | length 920
  Top Layer w10: v1(3928,5373) 3940.94,5360.06 U1.91
  Bottom Layer w10: v1(3928,5373) 3962.43,5338.57 4144.57,5338.57 4166,5360 4166,5792 4199,5825 Q2.9
NetQ2_10: Q2.10 U1.89 | length 909.9
  Top Layer w10: U1.89 3980.32,5450.32 v1(4004,5474)
  Bottom Layer w10: v1(4004,5474) 4004,5888 4041,5925 Q2.10
NetQ2_15: Q2.15 U1.90 | length 1411.5
  Top Layer w10: U1.90 3960.63,5386.78 3962.44,5480.98 4018.63,5537.17 4018.63,6392.63 v1(4051,6425)
  Bottom Layer w10: v1(4051,6425) Q2.15
NetQ3_3: Q3.3 R9.1 U1.88 | length 2077.4
  Top Layer w10: U1.88 4000,5416.96 4036.56,5453.52 4036.56,6043.03 4121,6127.47 v1(4121,6574) ; Q3.3 4575,6719.57 4639.57,6655 R9.1
  Bottom Layer w10: v1(4121,6574) 4525,6574 4575,6624 Q3.3
NetQ3_5: Q3.5 R8.1 U1.87 | length 2170.7
  Top Layer w10: U1.87 4019.69,5402.69 4057,5440 4057,6033.15 4175,6151.15 v1(4175,6662) ; Q3.5 4375,6560 4410,6525 R8.1
  Bottom Layer w10: v1(4175,6662) 4352,6662 4375,6685 Q3.5
NetQ4_2: Q4.2 Q5.1 | length 148.2
  Top Layer w10: Q4.2 4087.4,6787.4 Q5.1
NetQ5_2: Q5.2 U1.97 | length 1664.7
  Top Layer w10: U1.97 3822.83,5408.29 3823.55,5409 3943,5409 3943,5491 4000,5548 4000,6585 4127.6,6712.6 Q5.2
NetQ6_1: Q6.1 U1.72 | length 1399
  Top Layer w10: U1.72 4634.17,5177.17 v1(4686,5229)
  Bottom Layer w10: v1(4686,5229) 5356,5229 5387,5260 5387,5344 5405.87,5362.87 5463,5362.87 5490,5335.87 5525,5335.87 Q6.1
NetQ6_2: Q6.2 U1.71 | length 1237
  Top Layer w10: U1.71 4698.48,5157.48 v1(4703,5162)
  Bottom Layer w10: v1(4703,5162) 5376,5162 5425,5211 Q6.2
NetQ6_7: Q6.7 U1.70 | length 942.2
  Top Layer w10: U1.70 4359.44,5137.8 4361.2,5139.56 4639.54,5139.56 4666.1,5113 4736,5113 4769.25,5146.25 4769.25,5360 4790,5380.75 4904.25,5380.75 4925,5360 Q6.7
NetQ6_9: Q6.9 U1.69 | length 999
  Top Layer w10: v1(4150,5071) 4150,5073.78 4194.33,5118.11 U1.69
  Bottom Layer w10: v1(4150,5071) 4187.89,5033.11 4203,5033.11 4536.11,4700 Q6.9
NetQ6_10: Q6.10 U1.67 | length 973.7
  Top Layer w10: v1(4211,5066) 4232.26,5066 4245,5078.74 U1.67
  Bottom Layer w10: v1(4211,5066) 4514.13,4762.87 4858.13,4762.87 4896,4725 4925,4725 Q6.10
NetQ6_15: Q6.15 U1.68 | length 1386.8
  Top Layer w10: U1.68 v1(4387.44,5098.43)
  Bottom Layer w10: v1(4387.44,5098.43) 4387.44,4987.6 4594.29,4780.75 4880.75,4780.75 4891.5,4770 5408,4770 5425,4753 Q6.15
NetQ7_3: Q7.3 R11.1 U1.74 | length 1941.1
  Top Layer w10: v1(4227,5159) 4227,5191 4252.54,5216.54 U1.74 ; R11.1 5680,5589.57 5694.57,5575 Q7.3
  Bottom Layer w10: v1(4227,5159) 4359,5291 4712,5291 4996,5575 Q7.3
NetQ7_5: Q7.5 R10.1 U1.73 | length 2306
  Top Layer w10: U1.73 4554.85,5196.85 v1(4715,5357) ; R10.1 5550,5544 5568,5526 5792,5526 5813,5547 5813,5775 Q7.5
  Bottom Layer w10: v1(4715,5357) 5133,5775 Q7.5
NetQ8_3: Q8.3 R13.1 U1.66 | length 2211.2
  Top Layer w10: v1(4115,5031) 4227,5031 4255.06,5059.06 U1.66 ; R13.1 5682,4414.57 5692.43,4425 Q8.3
  Bottom Layer w10: v1(4115,5031) 4130.77,5015.23 4186.28,5015.23 4776.51,4425 Q8.3
NetQ8_5: Q8.5 R12.1 U1.65 | length 2330.3
  Top Layer w10: U1.65 v1(4420,5039.37) ; R12.1 5525,4389 5536,4378 5785,4378 5813,4406 5813,4454 5792,4475 5708,4475 5687,4496 5687,4616 5696,4625 Q8.5
  Bottom Layer w10: v1(4420,5039.37) 4660.75,4798.62 4898.62,4798.62 4909.24,4788 5536,4788 5699,4625 Q8.5
NetQ9_2: Q9.2 Q10.1 | length 123.2
  Top Layer w10: Q9.2 5750,4889.4 5787.4,4852 Q10.1
NetQ10_2: Q10.2 U1.75 | length 1594.4
  Top Layer w10: U1.75 v1(4532.52,5236.22) ; v1(5603,4833) 5624,4812 5712.6,4812 Q10.2
  Bottom Layer w10: v1(4532.52,5236.22) 4935.74,4833 v1(5603,4833)
NetQ11_3: Q11.3 R15.1 U1.49 | length 2163.6
  Top Layer w10: U1.49 4216.54,4819.3 v1(4223.98,4826.74) ; R15.1 4685.43,3194.57 4700,3180 Q11.3
  Bottom Layer w10: v1(4223.98,4826.74) 4705.56,4345.16 4705.56,3362.56 4700,3357 Q11.3
NetQ11_5: Q11.5 R14.1 U1.48 | length 2622.9
  Top Layer w10: U1.48 4196.85,4638.15 4977,3858 4977,3313 4900,3236 Q11.5 ; v1(4673,3376) 4673,3325 R14.1
  Bottom Layer w10: v1(4673,3376) 4662,3365 4662,3070 4688,3044 4880,3044 4900,3064 Q11.5
NetQ12_1: Q12.1 U1.47 | length 1787.1
  Top Layer w10: v1(4129.17,4832) 4177.17,4784 U1.47
  Bottom Layer w10: v1(4129.17,4832) 4363,4598.17 4363,3360 4353,3350 Q12.1
NetQ12_2: Q12.2 U1.46 | length 1382.6
  Top Layer w10: U1.46 4157.48,4623.18 4212,4568.66 4212,3465 v1(4197,3450)
  Bottom Layer w10: v1(4197,3450) Q12.2
NetQ12_7: Q12.7 U1.45 | length 906.8
  Top Layer w10: U1.45 4137.8,4601.25 4187,4552.04 4187,3966 v1(4171,3950)
  Bottom Layer w10: v1(4171,3950) Q12.7
NetQ12_9: Q12.9 U1.44 | length 884.2
  Top Layer w10: U1.44 4118.11,4487.89 v1(4154,4452)
  Bottom Layer w10: Q12.9 3752,4050 v1(4154,4452)
NetQ12_10: Q12.10 U1.42 | length 1325.1
  Top Layer w10: v1(3947,3803) 4057.74,3803 4078.74,3824 U1.42
  Bottom Layer w10: Q12.10 3800,3950 v1(3947,3803)
NetQ12_15: Q12.15 U1.43 | length 1639
  Top Layer w10: Q12.15 4081,3450 4098.43,3467.43 U1.43
NetQ13_3: Q13.3 R17.1 U1.41 | length 2445.8
  Top Layer w10: Q13.3 3310,3275 3360,3325 R17.1 ; v1(4041,3843) 4059.06,3861.06 U1.41
  Bottom Layer w10: Q13.3 3310,3612 3488,3790 3894,3790 3914,3770 3968,3770 v1(4041,3843)
NetQ13_5: Q13.5 R16.1 U1.40 | length 2284.6
  Top Layer w10: R16.1 3389.57,3222.43 3424,3188 3498,3188 3510,3176 ; Q13.5 3510,3176 ; U1.40 4039.37,3942.01 3914.44,3817.08 3914.44,3763.44 3763,3612 3680,3612 3637,3569 3637,3421 3648,3410 3745,3410 3763,3392 3763,3326 3744,3307 3552,3307 3510,3265 3510,3176
NetQ14_2: Q14.2 Q15.1 | length 173.2
  Top Layer w10: Q14.2 4137.4,3162.4 Q15.1
NetQ15_2: Q15.2 U1.50 | length 2703.8
  Top Layer w10: U1.50 4236.22,4655.78 4995,3897 4995,3111 4908,3024 4365,3024 4301.4,3087.6 Q15.2
NetQ16_1: Q16.1 U1.27 | length 2011.7
  Top Layer w10: U1.27 3783.46,4748.46 3805.58,4770.58 3824,4770.58 3835,4781.58 3835,4917 v1(3784,4968)
  Bottom Layer w10: Q16.1 2400,4977 2432,5009 3521,5009 3546.56,4983.44 3768.56,4983.44 v1(3784,4968)
NetQ16_2: Q16.2 U1.18 | length 1518.9
  Top Layer w10: v1(3387,4976) 3557,4976 3573,4960 3573,4912 3597,4888 3633.43,4888 3647,4901.57 U1.18
  Bottom Layer w10: Q16.2 2500,4928 2548,4976 v1(3387,4976)
NetQ16_7: Q16.7 U1.17 | length 1037.4
  Top Layer w10: U1.17 3746.74,4921.26 3769,4899 v1(3769,4873)
  Bottom Layer w10: Q16.7 3000,4675 3037.87,4637.13 3120,4637.13 3259.87,4777 3464,4777 3487,4800 3487,4845.4 3514.6,4873 v1(3769,4873)
NetQ16_9: Q16.9 U1.16 | length 1611.4
  Top Layer w10: v1(3618,4921) 3618,4920.37 3618.69,4919.69 3639.94,4940.94 U1.16
  Bottom Layer w10: Q16.9 3317,5300 3416,5201 3676,5201 3817,5060 3817,4951.5 3855.26,4913.25 3855.26,4804.26 3825,4774 3779,4774 3769,4784 3769,4832 3777.44,4840.44 3792,4840.44 3801.56,4850 3801.56,4896 3792,4905.56 3633.44,4905.56 v1(3618,4921)
NetQ16_10: Q16.10 U1.14 | length 942.7
  Top Layer w10: v1(3563.32,5073) 3656,4980.32 U1.14
  Bottom Layer w10: Q16.10 3000,5113 3040,5073 v1(3563.32,5073)
NetQ16_15: Q16.15 U1.15 | length 1466.1
  Top Layer w10: v1(3572.68,5016) 3628.05,4960.63 U1.15
  Bottom Layer w10: Q16.15 2500,5087 2560,5027 3561.68,5027 v1(3572.68,5016)
NetQ17_3: Q17.3 R19.1 U1.24 | length 2312.5
  Top Layer w10: Q17.3 2176,4125 2209,4092 2209,4000 2219.43,3989.57 R19.1 ; v1(3617,4710) 3617,4753.46 3647,4783.46 U1.24
  Bottom Layer w10: Q17.3 3202.42,4125 3697.56,4620.14 3697.56,4692.44 3680,4710 v1(3617,4710)
NetQ17_5: Q17.5 R18.1 U1.23 | length 2442.7
  Top Layer w10: Q17.5 2304,3925 2325,3946 R18.1 ; v1(3617,4803.15) U1.23
  Bottom Layer w10: Q17.5 3028,3925 3715.43,4612.43 3715.43,4704.72 v1(3617,4803.15)
NetQ18_3: Q18.3 R21.1 U1.13 | length 2513.3
  Top Layer w10: Q18.3 2176,5650 2209,5617 2209,5528 2222.43,5514.57 R21.1 ; U1.13 3747,5000 3754.34,5007.34 3817.66,5007.34 v1(3850,4975)
  Bottom Layer w10: Q18.3 3362.55,5650 3836.44,5176.11 3836.44,4988.56 v1(3850,4975)
NetQ18_5: Q18.5 R20.1 U1.12 | length 2161.6
  Top Layer w10: Q18.5 2328,5450 2350,5472 R20.1 ; v1(3610,5121) 3610,5051.59 3641.91,5019.69 U1.12
  Bottom Layer w10: Q18.5 3008,5450 3040,5418 3040,5264 3183,5121 v1(3610,5121)
NetQ19_2: Q19.2 Q20.1 | length 123.2
  Top Layer w10: Q19.2 2125,4839.4 2162.4,4802 Q20.1
NetQ20_2: Q20.2 U1.25 | length 1848.7
  Top Layer w10: Q20.2 2087.6,4785 2103,4800.4 v1(2103,4807) ; v1(3665,4664) 3665,4763.78 U1.25
  Bottom Layer w10: v1(2103,4807) 2290.75,4619.25 3635.25,4619.25 3665,4649 v1(3665,4664)
RESET: P4.5 U1.30 | length 504.2
  Top Layer w10: P4.5 3518.56,4631.44 3697.56,4631.44 3712.12,4646 3832.52,4646 3842.52,4656 U1.30
SCK: P4.3 U1.20 | length 288.9
  Top Layer w10: P4.3 3464,4820 3507,4863 3566.77,4863 3567.57,4862.2 U1.20
XTAL1: C3.2 U1.34 Y1.1 | length 276
  Top Layer w10: U1.34 3921.26,4632.76 3936.02,4618 Y1.1 3936.02,4498.02 3925,4487 C3.2
XTAL2: C4.2 U1.33 Y1.2 | length 454.9
  Top Layer w10: Y1.2 3813.98,4498.02 3825,4487 C4.2 ; U1.33 3901.57,4757.57 v1(3914,4770)
  Bottom Layer w10: Y1.2 3914,4650.02 v1(3914,4770)
pads on no net: U1.1 U1.4 U1.5 U1.6 U1.7 U1.8 U1.9 U1.19 U1.26 U1.28 U1.29 U1.35 U1.36 U1.37 U1.38 U1.39 U1.51 U1.52 U1.53 U1.54 U1.55 U1.56 U1.63 U1.64 U1.76 U1.77 U1.78 U1.79

## Silkscreen, mask and mechanical layers (free items; w line width, h text height)
Drill Drawing:
  text ".LEGEND" at 6137.01,3200 h60
  text "Drill Drawing." at 6137.01,3100 h60

## Text inside footprints (layer, text, board x,y; h text height)
P4: Top Overlay "1" at 3410,5000 h50 r270; Top Overlay "2" at 3510,5020 h50 r270; Top Overlay "5" at 3410,4660 h50 r270; Top Overlay "6" at 3510,4660 h50 r270